# Altium PCB DC21.PcbDoc
Units mm, origin at the board's own origin, x right, y up, seen from the top; angles counter-clockwise.
Board outline 50 x 50 mm, 2 copper layers (Top Layer, Bottom Layer); 83 components, 55 nets, 253 pads, 153 vias.
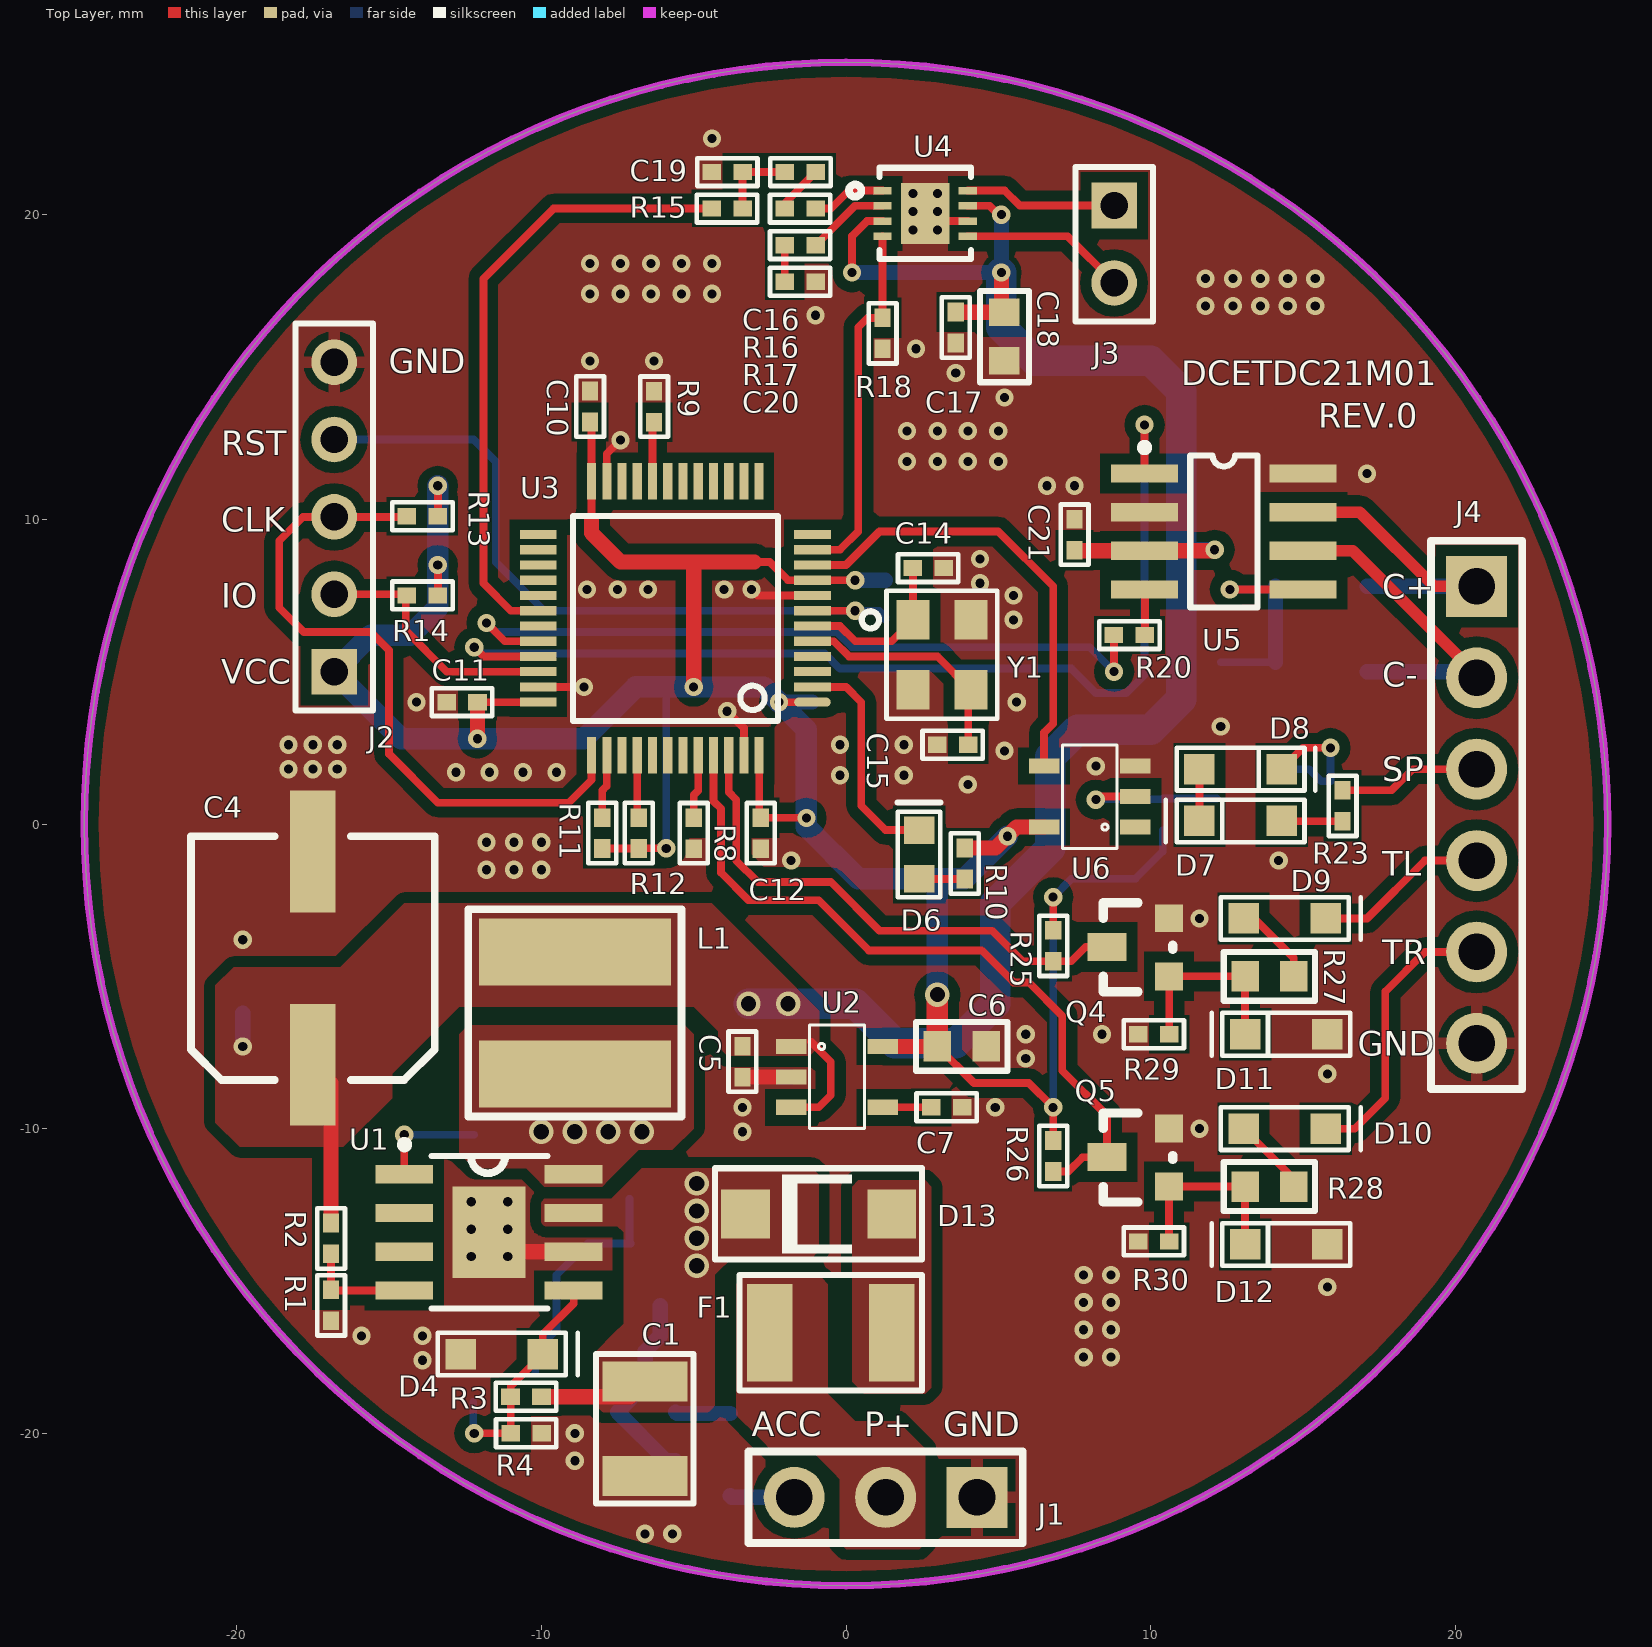
[diagram p0: Top Layer view]
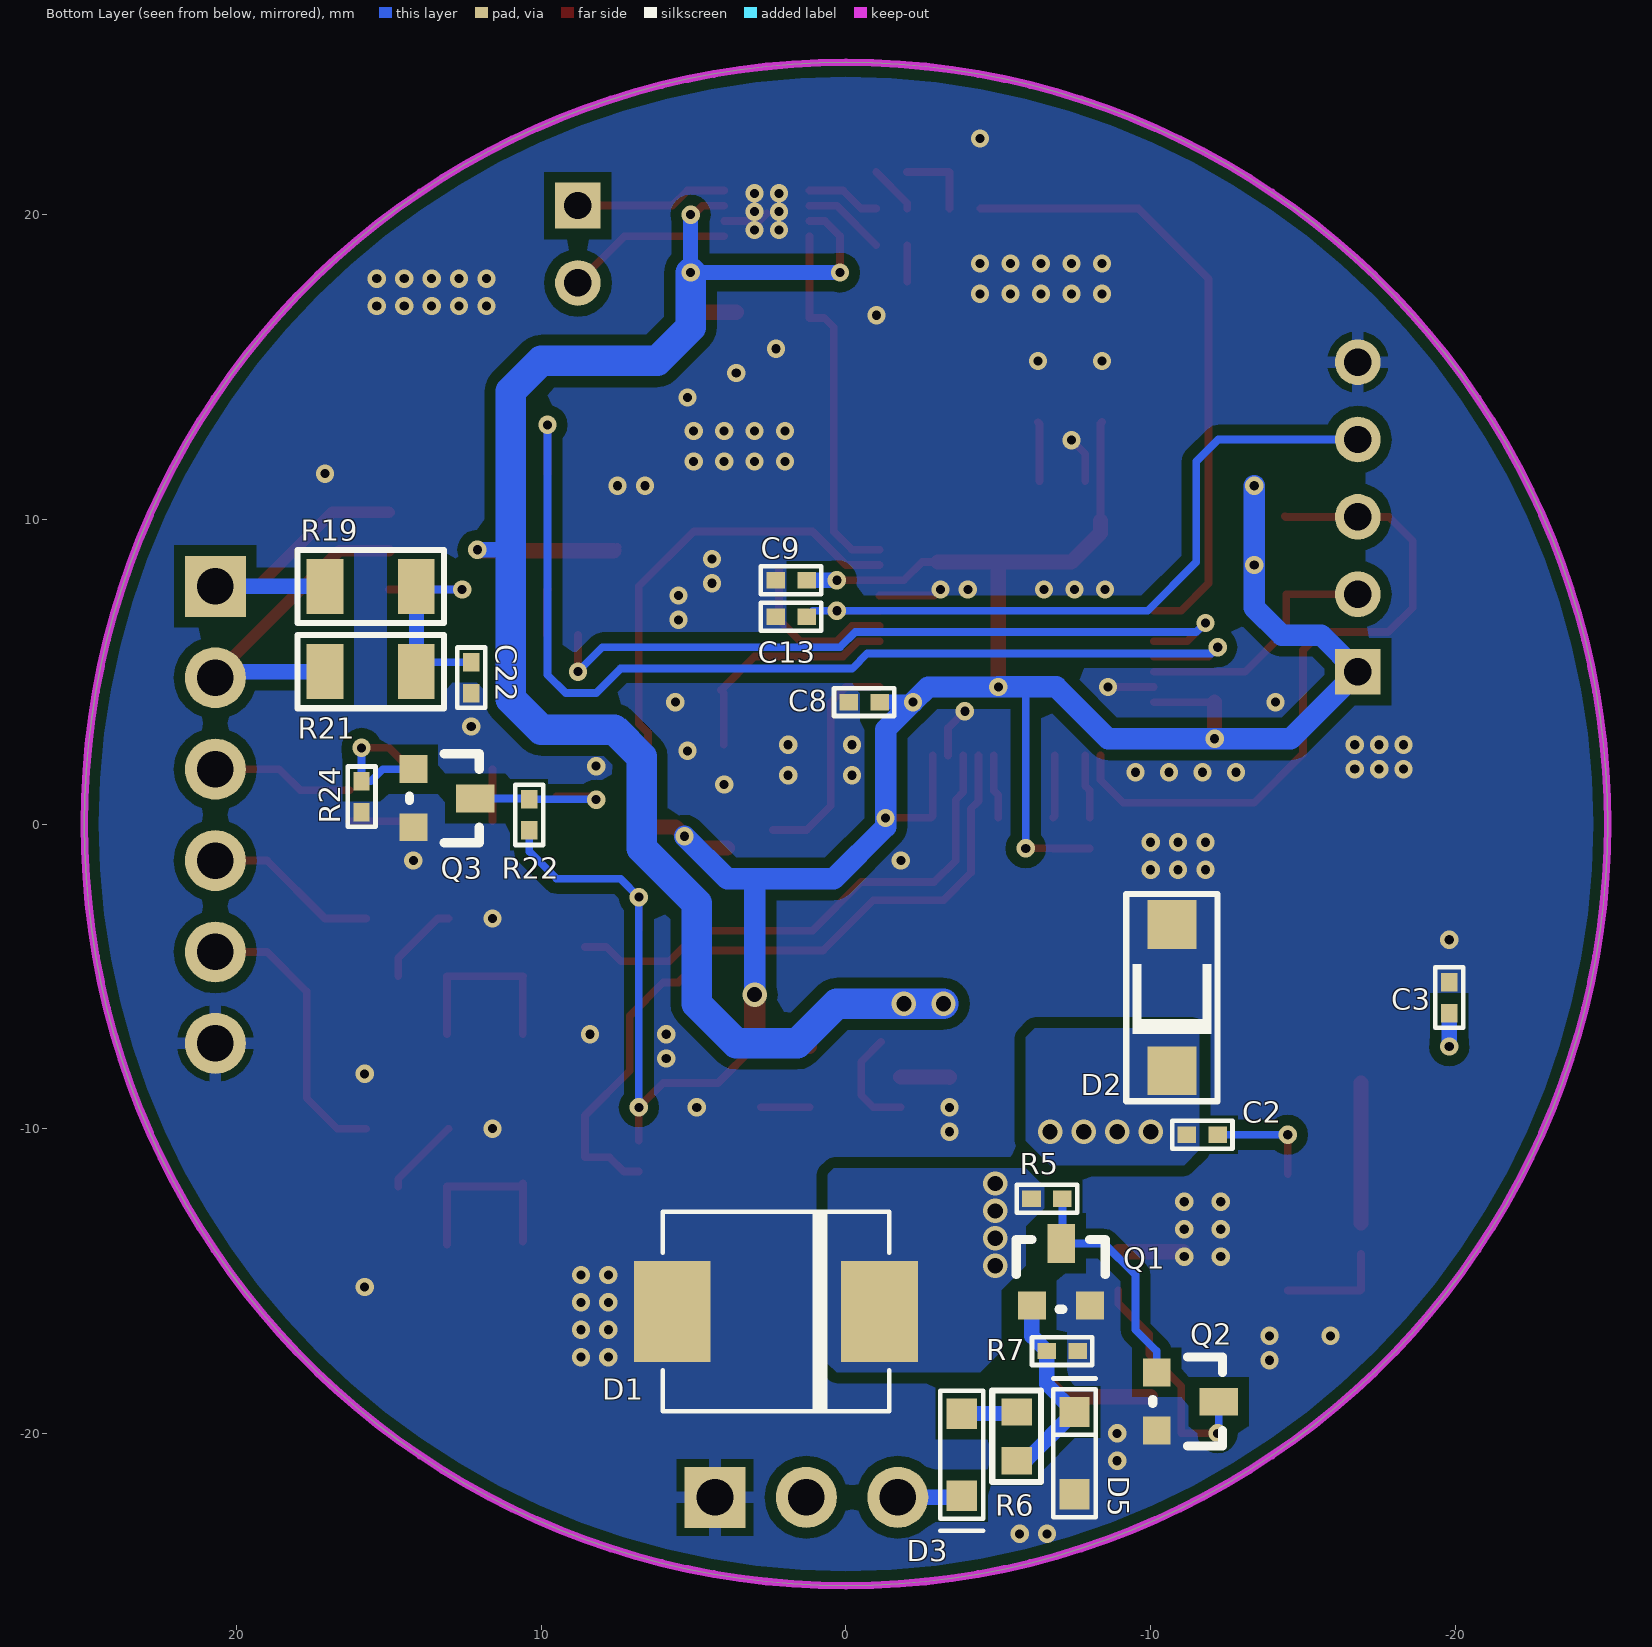
[diagram p1: Bottom Layer view, seen from below]

## Layer stack, top to bottom
Top Solder: solder mask 0.0102, Solder Resist, Dk 3.5
Top Layer: signal copper 0.0356
Dielectric 1: dielectric 0.32, FR-4, Dk 4.8
Bottom Layer: signal copper 0.0356
Bottom Solder: solder mask 0.0102, Solder Resist, Dk 3.5

## Board outline
-25,0 ccw(c0,0) 0,-25 ccw(c0,0) 25,0 ccw(c0,0) 0,25 ccw(c0,0)

## Design rules (kind name [scope] priority, off if disabled: settings)
Clearance Clearance_1 [InPolygon AND InNet('GND')] p1: gap=0.35
Clearance [All] p2: gap=0.127
ComponentClearance [All] p1: gap=0 collisioncheckmode=3 verticalgap=0 showdistances=FALSE
DiffPairsRouting [All] p1: maxlimit=0.254 minlimit=0.254 mostfreqgap=0.254 toplayer_minwidth=0.381 toplayer_maxwidth=0.5 toplayer_prefwidth=0.381 bottomlayer_minwidth=0.381 bottomlayer_maxwidth=0.5 bottomlayer_prefwidth=0.381 maxuncoupledlength=12.7
PolygonConnect PolygonConnect_1 [(InComponent('J1') OR InComponent('J2') OR InComponent('j4'))] p1: connectstyle=Relief reliefconductorwidth=0.4 reliefentries=4 polygonreliefangle="90 Angle" airgapwidth=0.254
PolygonConnect [All] p2: connectstyle=Direct reliefconductorwidth=0.254 reliefentries=4 polygonreliefangle="90 Angle" airgapwidth=0.254
RoutingVias [All] p1: holewidth=0.3 width=0.6 viastyle="Through Hole" minholewidth=0.3 minwidth=0.6 maxholewidth=0.5 maxwidth=0.8
SolderMaskExpansion [All] p1: expansion=0.102
Width [All] p1: maxlimit=4 minlimit=0.127 preferedwidth=0.254 minimp=50.000000 maximp=50.000000 favimp=50.000000
28 further rules are at their usual default settings.

## Classes and differential pairs
component class 1-POWER: C1 C2 C3 C4 C5 C6 C7 D1 D2 D3 D4 D5 D13 F1 J1 L1 Q1 Q2 R1 R2 R3 R4 R5 R6 R7 U1 U2
component class 2-MCU: C8 C9 C10 C11 C12 C13 C14 C15 D6 J2 R8 R9 R10 R11 R12 R13 R14 U3 Y1
component class 3-AUDIO-AMP: C16 C17 C18 C19 C20 J3 R15 R16 R17 R18 U4
component class 4-IO: C21 C22 D7 D8 D9 D10 D11 D12 J4 Q3 Q4 Q5 R19 R20 R21 R22 R23 R24 R25 R26 R27 R28 R29 R30 U5 U6
differential pair CAN: +CAN_P -CAN_N

## Components (designator, comment, footprint, x,y, rotation, side; value= is the part's Value field where it differs from the comment)
C1 "10uF/50V" 1210 -6.6,-18.3 r270 top
C2 "0.01uF/50V" 0402 -11.7,-10.2 r0 bottom
C3 "0.1uF/50V" 0402 -19.8,-5.7 r90 bottom
C4 "220uF/16V" DL-8*10.5 -17.5,-4.4 r180 top
C5 "0.1uF/50V" 0402 -3.4,-7.8 r270 top
C6 "10uF/6.3V" 0603 3.8,-7.3 r270 top
C7 "0.01uF/50V" 0402 3.3,-9.3 r0 top
C8 "0.1uF/50V" 0402 -0.6,4 r0 bottom
C9 "0.1uF/50V" 0402 1.8,8 r0 bottom
C10 "0.1uF/50V" 0402 -8.4,13.7 r90 top
C11 "0.1uF/50V" 0402 -12.6,4 r180 top
C12 "0.1uF/50V" 0402 -2.8,-0.3 r270 top
C13 "0.1uF" 0402 1.8,6.8 r0 bottom
C14 "20pF/50V" 0402 2.7,8.4 r180 top
C15 "20pF/50V" 0402 3.5,2.6 r0 top
C16 "0.1uF/50V" 0402 -1.5,21.4 r0 top
C17 "0.1uF/50V" 0402 3.6,16.3 r270 top
C18 "10uF/6.3V" 0603 5.2,16 r180 top
C19 "0.1uF/50V" 0402 -3.9,21.4 r0 top
C20 "0.1uF/50V" 0402 -1.5,17.8 r180 top
C21 "0.1uF/50V" 0402 7.5,9.5 r270 top
C22 "1000pF(DNP)" 0402 12.3,4.8 r90 bottom
D1 "SMDJ33A" SMC 5.7,-16 r0 bottom
D2 "B360A" B320A -10.7,-3.3 r270 bottom
D3 "MM3Z6V2ST1G" SOD323F -3.8,-20.7 r90 bottom
D4 "MM3Z5V1ST1G" SOD323F -11.3,-17.4 r180 top
D5 "1N5819HW" 1N5819 -7.5,-19.3 r270 bottom
D6 "LED GREEN" LED0603 2.4,-1.8 r180 top
D7 "1N5819HW" 1N5819 11.6,0.1 r0 top
D8 "1N5819HW" 1N5819 14.3,1.8 r180 top
D9 "MM3Z6V2ST1G" SOD323F 14.4,-3.1 r180 top
D10 "MM3Z6V2ST1G" SOD323F 14.4,-10 r180 top
D11 "1N5819HW" 1N5819 13.1,-6.9 r0 top
D12 "1N5819HW" 1N5819 13.1,-13.8 r0 top
D13 "B360A" B320A 1.5,-12.8 r180 top
F1 "1.1A/33V" 1812 1.5,-16.7 r180 top
J1 "POWER" HEAD-3P 4.3,-22.1 r180 top
J2 "SWD" HDR1X5 -16.8,5 r90 top
J3 "SPEAKER" HDR1X2 8.8,20.3 r270 top
J4 "I/O" HEAD-6P 20.7,7.8 r270 top
L1 "8.2uH/1.6A" IND-SMD-5.8*5.8 -8.9,-6.2 r180 top
Q1 "S9014" NPN -6.1,-15.8 r180 bottom
Q2 "S9014" NPN -10.2,-18 r270 bottom
Q3 "S9014" NPN 14.2,1.8 r270 bottom
Q4 "S9014" NPN 10.6,-5 r90 top
Q5 "S9014" NPN 10.6,-11.9 r90 top
R1 "1.1K/1%" 0402 -16.9,-15.8 r90 top
R2 "3.16K/1%" 0402 -16.9,-13.6 r270 top
R3 "80.2K/1%" 0402 -10.5,-18.8 r180 top
R4 "20K/1%" 0402 -10.5,-20 r0 top
R5 "47K" 0402 -6.6,-12.3 r0 bottom
R6 "15K" 0603 -5.6,-20.1 r0 bottom
R7 "47K" 0402 -7.1,-17.3 r0 bottom
R8 "0" 0402 -5,-0.3 r270 top
R9 "0" 0402 -6.3,13.7 r270 top
R10 "330" 0402 3.9,-1.3 r90 top
R11 "10K" 0402 -8,-0.3 r90 top
R12 "10K" 0402 -6.8,-0.3 r90 top
R13 "10K" 0402 -13.9,10.1 r180 top
R14 "10K" 0402 -13.9,7.5 r180 top
R15 "2K" 0402 -3.9,20.2 r180 top
R16 "150K" 0402 -1.5,20.2 r180 top
R17 "150K" 0402 -1.5,19 r180 top
R18 "10K" 0402 1.2,16.1 r90 top
R19 "62/(1/4W)(DNP)" 1206 17.1,7.8 r180 bottom
R20 "1K" 0402 9.3,6.2 r0 top
R21 "62(1/4W)(DNP)" 1206 14.1,5 r0 bottom
R22 "47K" 0402 10.4,0.3 r90 bottom
R23 "10K" 0402 16.3,0.6 r270 top
R24 "47K" 0402 15.9,0.9 r270 bottom
R25 "47K" 0402 6.8,-4 r90 top
R26 "47K" 0402 6.8,-10.9 r90 top
R27 "15K" 0603 13.9,-5 r90 top
R28 "15K" 0603 13.9,-11.9 r90 top
R29 "47K" 0402 10.1,-6.9 r0 top
R30 "47K" 0402 10.1,-13.7 r0 top
U1 "LM22676MR-ADJ" PSO8 -14.5,-11.5 r270 top
U2 "TPS73633DBVT" SOT23-5 -1.8,-7.3 r270 top
U3 "STM32F103CBT6" LQFP48 -1.1,4 r180 top
U4 "LM4673SD" WSON8 2.6,20.04 r270 top
U5 "TJA1040T" SO8 12.4,9.6 r270 top
U6 "SN74LVC1G14DBV" SOT23-5 9.5,-0.1 r90 top
Y1 "8MHz" XTAL4_SX_3225 2.2,6.7 r270 top

## Footprints (in the part's own frame and the unit in brackets; to place one, negate y for a bottom-side part, rotate by r counter-clockwise, add the part's x,y. Pads: shape width x height; smd on the part's side, far side on the other; paste and mask are expansions set on the pad)
1N5819 [mm]
  rect 1x1 smd: 1(2.7,0) 2(0,0)
  silkscreen extent -1.1,-0.7 3.45,0.7
0402 [mil] "Chip Capacitor, Body 1.0x0.5mm, IPC High Density"
  rect 24x21 smd: 1(20.13,0) 2(-19.87,0)
  silkscreen extent -39,-18 39,18
0603 [mm]
  rect 1x0.9 smd: 1(0,0.8) 2(0,-0.8)
  silkscreen extent -0.8,-1.5 0.8,1.5
1206 [mm]
  rect 1.2x1.8 smd: 1(0,0) 2(3,0)
  silkscreen extent -0.9,-1.2 3.9,1.2
1210 [mm]
  rect 1.3x2.8 smd: 1(0,0) 2(3.1,0)
  silkscreen extent -0.9,-1.6 4,1.6
1812 [mm]
  rect 1.5x3.2 smd: 1(0,0) 2(4,0)
  silkscreen extent -1,-1.9 5,1.9
B320A [mm]
  rect 1.6x1.6 smd: 1(0,0) 2(4.8,0)
  silkscreen extent -1,-1.5 5.8,1.5
DL-8*10.5 [mm]
  rect 1.5x4 smd: 1(0,3.5) 2(0,-3.5)
  silkscreen extent -4,-4 4,4
HDR1X2 [mm] "Connector; Header; 2 Position"
  rect 1.5x1.5 hole 0.9: 1(0,0)
  round 1.5 hole 0.9: 2(2.54,0)
  silkscreen extent -1.27,-1.27 3.81,1.27
HDR1X5 [mm] "Connector; Header; 5 Position"
  rect 1.5x1.5 hole 0.9: 1(0,0)
  round 1.5 hole 0.9: 2(2.54,0) 3(5.08,0) 4(7.62,0) 5(10.16,0)
  silkscreen extent -1.27,-1.27 11.43,1.27
HEAD-3P [mm]
  rect 2x2 hole 1.2: 1(0,0)
  round 2 hole 1.2: 2(3,0) 3(6,0)
  silkscreen extent -1.5,-1.5 7.5,1.5
HEAD-6P [mm]
  rect 2x2 hole 1.2: 1(0,0)
  round 2 hole 1.2: 2(3,0) 3(6,0) 4(9,0) 5(12,0) 6(15,0)
  silkscreen extent -1.5,-1.5 16.5,1.5
IND-SMD-5.8*5.8 [mm]
  rect 6.3x2.2 smd: 1(0,2) 2(0,-2)
  silkscreen extent -3.5,-3.4 3.5,3.4
LED0603 [mm]
  rect 1x0.9 smd: 1(0,0) 2(0,-1.6)
  silkscreen extent -0.7,-2.5 0.7,0.6
LQFP48 [mm]
  oval 1.2x0.3 smd: 1(0,0)
  rect 1.2x0.3 smd: 2(0,-0.5) 3(0,-1) 4(0,-1.5) 5(0,-2) 6(0,-2.5) 7(0,-3) 8(0,-3.5) 9(0,-4) 10(0,-4.5) 11(0,-5) 12(0,-5.5) 25(9,-5.5) 26(9,-5) 27(9,-4.5) 28(9,-4) 29(9,-3.5) 30(9,-3) 31(9,-2.5) 32(9,-2) 33(9,-1.5) 34(9,-1) 35(9,-0.5) 36(9,0)
  rect 0.3x1.2 smd: 13(1.75,-7.25) 14(2.25,-7.25) 15(2.75,-7.25) 16(3.25,-7.25) 17(3.75,-7.25) 18(4.25,-7.25) 19(4.75,-7.25) 20(5.25,-7.25) 21(5.75,-7.25) 22(6.25,-7.25) 23(6.75,-7.25) 24(7.25,-7.25) 37(7.25,1.75) 38(6.75,1.75) 39(6.25,1.75) 40(5.75,1.75) 41(5.25,1.75) 42(4.75,1.75) 43(4.25,1.75) 44(3.75,1.75) 45(3.25,1.75) 46(2.75,1.75) 47(2.25,1.75) 48(1.75,1.75)
  silkscreen extent 1.13,-6.11 7.86,0.62
NPN [mil]
  rect 36x50 smd: 1(38,80)
  rect 36x36 smd: 2(0,0) 3(75,0)
  silkscreen extent -20,-5 95,85
PSO8 [mm]
  rect 0.6x1.9 smd: 1(0,0) 2(1.27,0) 3(2.54,0) 4(3.81,0) 5(3.81,5.56) 6(2.54,5.56) 7(1.27,5.56) 8(0,5.56)
  rect 3x2.4 smd: 9(1.9,2.78)
  silkscreen extent -1.1,-0.11 4.4,4.7
SMC [mil]
  rect 99x130 smd: 1(0,0) 2(-267.72,0)
  silkscreen extent -280,-129 12,129
SO8 [mm] "Small Outline; 8 Leads; Body Width 3.9 mm; Pitch 1.27 mm"
  rect 0.6x2.2 smd: 1(-1.905,-2.6) 2(-0.635,-2.6) 3(0.635,-2.6) 4(1.905,-2.6) 5(1.905,2.6) 6(0.635,2.6) 7(-0.635,2.6) 8(-1.905,2.6)
  silkscreen extent -2.88,-2.72 2.5,1.1
SOD323F [mm]
  rect 1x1 smd: 1(-1.35,0) 2(1.35,0)
  silkscreen extent -2.5,-0.7 2.1,0.7
SOT23-5 [mm]
  rect 0.5x1 smd: 1(0,0) 2(1,0) 3(2,0) 4(2,3) 5(0,3)
  silkscreen extent -0.7,0.6 2.7,2.4
WSON8 [mm]
  rect 0.25x0.6 smd: 1(-0.75,-1.4) 2(-0.25,-1.4) 3(0.25,-1.4) 4(0.75,-1.4) 5(0.75,1.4) 6(0.25,1.4) 7(-0.25,1.4) 8(-0.75,1.4)
  rect 2x1.6 smd: ""(0,0)
  silkscreen extent -1.5,-2.5 1.5,1.5
XTAL4_SX_3225 [mil]
  rect 51x43 smd: 1(0,0) 2(90.56,0) 3(90.56,74.8) 4(0,74.8)
  silkscreen extent -37,-66 128,109

## Part data
C1 C2 C3 C5 C6 C7 C8 C9 C10 C11 C12 C13 C14 C15 C16 C17 C18 C19 C20: library part Cap, "Capacitor"
C4: library part "CAP WP"
C21 C22: library part "P_CAP NP"
D1 D2 D5 D7 D8 D11 D12 D13: library part "Diode 11DQ03", "Schottky Rectifier"
D3 D4 D9 D10: library part MMGZ5231BPTLL34
D6: library part LN01401_1
F1: library part 2A_32VDC_0467-002
J1: library part "Header 3", "Header, 3-Pin"
J2: library part "Header 5", "Header, 5-Pin"
J3: library part "Header 2", "Header, 2-Pin"
J4: library part "Header 6", "Header, 6-Pin"
L1: library part 4.7UH_CDH2D09BNP-4R7MC_0.7A_20%
Q1 Q2 Q3 Q4 Q5: library part MMBT3904_NL_SOT23-3
R1 R2 R3 R4 R5 R8 R9 R11 R12 R13 R14 R15 R16 R17 R18 R25 R26: library part Res3, "Resistor"
R6 R7 R27 R28 R29 R30: library part R
R10: library part CR16-1003FM
R19 R20 R21 R22 R23 R24: library part P_R
U1: library part LM22670_0
U3: library part STM32F103CX-LQFP48
U5: library part TJA1040T_SO_8P, "IC XCVR CAN HS 5V SO8"
U6: library part 74LVC1G04GW_SOT353-5
Y1: library part XTAL_13Y_A, "XTAL 24MHZ -- 3.2X2.5MM SMT"

## Via types
v1: diameter 0.6, hole 0.3, Top Layer to Bottom Layer, tented both sides, 142 vias
v2: diameter 0.8, hole 0.5, Top Layer to Bottom Layer, tented both sides, 11 vias

## Nets (pads, with @x,y where several pads share a name; then routed paths per layer and width w, separated by ;. In a path a pad name is that pad's centre, name@x,y a point inside that pad or via, vN(x,y) a via of type N, cw(c..) or ccw(c..) an arc to the next point about the centre after c; other vN are vias at no path point)
ACC: D3.1 J1.3 | length 2.1
  Bottom Layer w0.5: D3.1 -3.75,-22.1 J1.3
AMP-SHDN: R18.1 U3.11 U4.4 | length 12.1
  Top Layer w0.254: U3.11 -0.2,9 0.4,9.6 0.4,16.3 0.711,16.611 R18.1 U4.4
CAN_N: J4.2 R21.2 U5.6 | length 10.7
  Top Layer w0.381: U5.6 16.635,8.965 20.7,4.9 J4.2
  Bottom Layer w0.381: J4.2@20.075,5 J4.2@20.275,4.8
  Bottom Layer w0.5: R21.2 J4.2@20.075,5
CAN_P: J4.1 R19.1 U5.7 | length 9.9
  Top Layer w0.381: U5.7 16.865,10.235 19.3,7.8 J4.1
  Bottom Layer w0.5: R19.1 J4.1@20.275,7.8
CANRX: R20.2 U3.32 | length 24.4
  Top Layer w0.254: v1(-11.8,6.6) -11.2,6 U3.32 ; R20.2 8.795,5.005 v1(8.8,5)
  Bottom Layer w0.254: v1(-11.8,6.6) -11.5,6.3 -0.3,6.3 0.2,5.8 8,5.8 v1(8.8,5)
CANTX: U3.33 U5.1 | length 34.9
  Top Layer w0.254: v1(-12.2,5.8) -11.9,5.5 U3.33 ; U5.1 v1(9.8,13.1)
  Bottom Layer w0.254: v1(-12.2,5.8) -12,5.6 -0.7,5.6 -0.2,5.1 7.4,5.1 8.2,4.3 9.2,4.3 9.8,4.9 v1(9.8,13.1)
GND: C1.2 C3.1 C4.2 C5.1 C6.1 C7.1 C8.1 C9.1 C10.1 C11.1 C12.1 C13.1 C14.2 C15.2 C17.1 C18.1 C19.2 C20.2 C21.2 C22.2 D1.1 D2.1 D4.2 D5.1 D11.1 D12.1 J1.1 J2.5 J4.6 Q1.3 Q2.3 Q3.3 Q4.3 Q5.3 R1.2 R4.1 R7.2 R8.1 R9.2 R18.2 R24.1 R29.2 R30.2 U1.6 U1.9 U2.2 U3.8 U3.23 U3.35 U3.47 U4. U4.6 U5.2 U5.8 U6.3 Y1.2 Y1.4 | length 12
  Top Layer w0.254: U3.35 v1(-8.6,4.5) ; U3.23 -7.85,12.15 v1(-7.4,12.6) ; v1(-3.9,3.7) -3.35,3.15 U3.47 ; v1(-3.1,7.7) -2.9,7.5 U3.8 ; U4. 2.85,19.79 U4.6
  Top Layer w0.5: U1.9@-11.08,-14.04 U1.6 ; C5.1 -3.389,-8.3 U2.2
  other v1: -6.6,-23.3 -5.7,-23.3 -8.9,-20.9 -8.9,-20 -13.9,-17.6 7.8,-17.5 8.7,-17.5 -15.9,-16.8 -13.9,-16.8 7.8,-16.6 8.7,-16.6 7.8,-15.7 8.7,-15.7 15.8,-15.2 7.8,-14.8 8.7,-14.8 -12.3,-14.2 -11.1,-14.2 -12.3,-13.3 -11.1,-13.3 -12.3,-12.4 -11.1,-12.4 -3.4,-10.1 11.6,-10 -3.4,-9.3 4.9,-9.3 15.8,-8.2 5.9,-7.7 5.9,-6.9 8.4,-6.9 -19.8,-3.8 11.6,-3.1 -11.8,-1.5 -10.9,-1.5 -10,-1.5 -1.8,-1.2 14.2,-1.2 -11.8,-0.6 -10.9,-0.6 -10,-0.6 4,1.3 -0.2,1.6 1.9,1.6 -12.8,1.7 -11.7,1.7 -10.6,1.7 -9.5,1.7 -18.3,1.8 -17.5,1.8 -16.7,1.8 8.2,1.9 5.2,2.4 -18.3,2.6 -17.5,2.6 -16.7,2.6 -0.2,2.6 1.9,2.6 12.3,3.2 -14.1,4 5.6,4 5.5,6.7 5.5,7.5 -8.5,7.7 -7.5,7.7 -6.5,7.7 -4,7.7 4.4,7.9 4.4,8.7 6.6,11.1 7.5,11.1 17.1,11.5 2,11.9 3,11.9 4,11.9 5,11.9 2,12.9 3,12.9 4,12.9 5,12.9 5.2,14 3.6,14.8 -8.4,15.2 -6.3,15.2 2.3,15.6 -1,16.7 11.8,17 12.7,17 13.6,17 14.5,17 15.4,17 -8.4,17.4 -7.4,17.4 -6.4,17.4 -5.4,17.4 -4.4,17.4 11.8,17.9 12.7,17.9 13.6,17.9 14.5,17.9 15.4,17.9 -8.4,18.4 -7.4,18.4 -6.4,18.4 -5.4,18.4 -4.4,18.4 2.2,19.5 3,19.5 2.2,20.1 3,20.1 2.2,20.7 3,20.7 -4.4,22.5
LED: D6.2 U3.2 | length 7.4
  Top Layer w0.254: U3.2 0,4.5 0.5,4 0.5,0.6 1.3,-0.2 D6.2
NetC2_1: C2.1 D2.2 L1.1 U1.8
  other v2: -10,-10.1 -8.9,-10.1 -7.8,-10.1 -6.7,-10.1
NetC2_2: C2.2 U1.1 | length 3.6
  Top Layer w0.254: U1.1 v1(-14.5,-10.2)
  Bottom Layer w0.254: v1(-14.5,-10.2) C2.2
NetC7_2: C7.2 U2.4 | length 1.6
  Top Layer w0.254: U2.4 C7.2
NetC16_1: C16.1 R16.1 | length 1.6
  Top Layer w0.254: R16.1 -2.011,20.378 C16.1
NetC16_2: C16.2 C19.1 R15.2 | length 2.6
  Top Layer w0.254: R15.2 -3.395,21.394 C19.1 C16.2
NetC20_1: C20.1 R17.1 | length 1.2
  Top Layer w0.254: C20.1 R17.1
NetC22_1: C22.1 R19.2 R21.1 U5.5 | length 8.2
  Top Layer w0.254: v1(12.6,7.7) 12.605,7.695 U5.5
  Bottom Layer w0.254: C22.1 14.089,5.311 R21.1@14.1,5.3 ; v1(12.6,7.7) 14,7.7 R19.2
  Bottom Layer w0.5: R21.1@14.1,5.3 R19.2
NetD3_2: D3.2 R6.2 | length 1.8
  Bottom Layer w0.5: R6.2 -5.55,-19.35 D3.2
NetD4_1: D4.1 Q2.1 R3.1 R4.2 U1.5 | length 7.9
  Top Layer w0.254: v1(-12.2,-20) R4.2 -11.005,-18.455 D4.1 -9.95,-16.75 -8.94,-15.74 U1.5
  Bottom Layer w0.254: Q2.1 -12.232,-20.032 v1(-12.2,-20)
NetD5_2: D5.2 Q1.2 R6.1 R7.1 | length 6.6
  Bottom Layer w0.5: Q1.2 -6.1,-16.811 R7.1 -6.589,-18.389 D5.2 -5.9,-20.9 R6.1
NetD6_1: D6.1 R10.2 | length 1.5
  Top Layer w0.254: D6.1 2.405,-1.805 R10.2
NetD7_1: D7.1 R23.1 | length 2
  Top Layer w0.254: D7.1 14.311,0.089 R23.1
NetD7_2: D7.2 D8.1 | length 1.7
  Top Layer w0.254: D7.2 D8.1
NetD8_2: D8.2 Q3.2 R24.2 | length 4.8
  Top Layer w0.254: D8.2 15,2.5 v1(15.9,2.5)
  Bottom Layer w0.254: Q3.2 15.2,1.8 15.595,1.405 R24.2 v1(15.9,2.5)
NetD9_2: D9.2 R27.2 | length 2.8
  Top Layer w0.254: D9.2 13.4,-3.1 14.7,-4.4 R27.2
NetD10_2: D10.2 R28.2 | length 2.6
  Top Layer w0.254: D10.2 14.7,-11.65 R28.2
NetD11_2: D11.2 Q4.2 R27.1 R29.1 | length 6.3
  Top Layer w0.254: R29.1 10.611,-5.011 Q4.2 R27.1 D11.2
NetD12_2: D12.2 Q5.2 R28.1 R30.1 | length 6.3
  Top Layer w0.254: R30.1 10.6,-13.689 10.6,-11.8 10.7,-11.9 R28.1 D12.2
NetD13_1: D13.1 F1.1
NetF1_2: F1.2 J1.2
NetJ3_1: J3.1 U4.8 | length 5
  Top Layer w0.254: U4.8 5.21,20.79 5.7,20.3 J3.1
NetJ3_2: J3.2 U4.5 | length 5.4
  Top Layer w0.254: U4.5 7.27,19.29 J3.2
NetQ1_1: Q1.1 Q2.2 R5.2 | length 7.8
  Bottom Layer w0.254: Q2.2 -10.2,-17.3 -9.5,-16.6 -9.5,-14.8 -8.468,-13.768 Q1.1 -7.105,-13.728 R5.2
NetQ3_1: Q3.1 R22.1 U6.2 | length 5.3
  Top Layer w0.254: v1(8.2,0.8) 8.3,0.9 U6.2
  Bottom Layer w0.254: v1(8.2,0.8) 8.211,0.811 R22.1 10.424,0.835 Q3.1
NetR1_1: R1.1 R2.1 U1.4 | length 3.6
  Top Layer w0.254: R2.1 R1.1 -16.879,-15.31 U1.4
NetR8_2: R8.2 U3.44 | length 2.1
  Top Layer w0.254: R8.2 -5,0.95 -4.85,1.1 U3.44
NetR9_1: R9.1 U3.20 | length 2
  Top Layer w0.254: U3.20 -6.35,13.139 R9.1
NetR11_1: R11.1 U3.38 | length 2.1
  Top Layer w0.254: R11.1 -8,1.1 -7.85,1.25 U3.38
NetR12_1: R12.1 U3.40 | length 2.1
  Top Layer w0.254: U3.40 -6.85,0.261 R12.1
NetR16_2: R16.2 U4.1 | length 2.4
  Top Layer w0.254: R16.2 -0.5,20.2 0.09,20.79 U4.1
NetR17_2: R17.2 U4.2 | length 2.7
  Top Layer w0.254: R17.2 0.295,20.29 U4.2
NetR20_1: R20.1 U5.4 | length 1.5
  Top Layer w0.254: U5.4 9.811,7.684 R20.1
NRST: C13.2 J2.4 U3.7 | length 24.1
  Top Layer w0.254: U3.7 v1(0.3,7)
  Bottom Layer w0.254: J2.4 -12.22,12.62 -11.5,11.9 -11.5,8.6 -9.9,7 v1(0.3,7) 1.095,7 C13.2 1.195,6.8 C13.2@1.295,6.7
P3V3: C6.2 C8.2 C9.2 C10.2 C11.2 C12.2 J2.1 R10.1 R11.2 R12.2 R13.2 R14.2 R22.2 R25.1 R26.1 U2.5 U3.1 U3.9 U3.24 U3.36 U3.48 U6.5 | length 102.9
  Top Layer w0.254: R14.2 v1@-13.395,8.495 ; R13.2 v1@-13.395,11.1 ; C11.2 U3.36 ; C10.2 -8.35,13.145 U3.24 -8.35,9.95 ; R11.2 R12.2 -6.795,-0.8 v1(-5.9,-0.8) ; -3,8.6 -2.5,8.6 -1.9,8 U3.9 v1(0.3,8) ; U3.48 -2.85,0.255 C12.2 -1.305,0.205 v1(-1.3,0.2) ; v1(-2.2,4) U3.1 ; C6.2 4.2,-8.5 6,-8.5 v1(6.8,-9.3) R26.1 ; R25.1 v1(6.8,-2.4)
  Top Layer w0.5: v1(-13.4,8.5) v1@-13.395,8.495 ; v1(-12.1,2.8) -12.095,2.805 C11.2 ; -8.35,9.95 -8.35,9.55 -7.4,8.6 -5,8.6 ; v1(-5,4.5) -5,8.6 ; -3,8.6 -5,8.6 ; U2.5 C6.2 ; R10.1 4.911,-0.789 v1(5.3,-0.4) 5.6,-0.1 U6.5
  Top Layer w0.7: C6.2 v2(3,-5.6)
  Bottom Layer w0.254: v1(-5.9,-0.8) -5.9,4.496 ; v1(6.8,-9.3) v1(6.8,-2.4) 7.4,-1.8 9.5,-1.8 10.4,-0.9 R22.2
  Bottom Layer w0.5: v1(-2.2,4) C8.2 ; v1(0.3,8) C9.2
  Bottom Layer w0.7: v1(-13.4,11.1) v1(-13.4,8.5) -13.4,7.1 -14.3,6.2 -15.6,6.2 J2.1 -14.6,2.8 v1(-12.1,2.8) -8.6,2.8 -6.9,4.5 v1(-5,4.5) ; -5.6,4.496 -2.696,4.496 v1(-2.2,4) -1.3,3.1 v1(-1.3,0.2) -1.3,-0.1 0.4,-1.8 3,-1.8 ; v2(3,-5.6) 3,-1.8 ; v1(5.3,-0.4) 3.9,-1.8 3,-1.8
P5V0: C3.2 C4.1 C5.2 C17.2 C18.2 C21.1 L1.2 R2.2 U2.1 U2.3 U4.3 U4.7 U5.3 | length 70.1
  Top Layer w0.254: U2.3 -0.9,-9.3 -0.5,-8.9 -0.5,-7.8 -1.15,-7.15 ; v1(0.2,18.1) 0.2,19.3 0.69,19.79 U4.3 ; U4.7 4.71,20.29 5,20 v1(5.1,20) ; C21.1@7.5,9.089 C21.1@7.624,8.965 ; v1@12.065,8.965 v1(12.1,9)
  Top Layer w0.5: R2.2 C4.1@-16.9,-8.5 ; C17.2 3.605,16.8 C18.2 5.1,16.9 v1(5.1,18.1) ; C21.1@7.624,8.965 U5.3 v1@12.065,8.965
  Bottom Layer w0.5: v1(-19.8,-7.3) C3.2 ; v1(0.2,18.1) v1(5.1,18.1) v1(5.1,20) ; 11,9 v1(12.1,9)
  Bottom Layer w1: v2(-3.2,-5.9) v2(-1.9,-5.9) 0.3,-5.9 1.6,-7.2 3.6,-7.2 4.9,-5.9 4.9,-2.6 6.7,-0.8 6.7,2.2 7.6,3.1 10,3.1 11,4.1 11,9 11,14.2 10,15.2 6.2,15.2 5.1,16.3 v1(5.1,18.1)
PULSE: J4.3 R23.2 | length 4.7
  Top Layer w0.254: R23.2 17.905,1.105 18.6,1.8 J4.3
PWM-AUDIO: R15.1 U3.30 | length 20.6
  Top Layer w0.254: U3.30 -11,7 -11.9,7.9 -11.9,17.9 -9.6,20.2 R15.1
SPEED-PULSE: U3.10 U6.4 | length 15.1
  Top Layer w0.254: U3.10 0,8.5 1.1,9.6 5,9.6 6.8,7.8 6.8,3.3 6.5,3 U6.4
SWCLK: J2.3 R13.1 U3.37 | length 22.7
  Top Layer w0.254: R13.1 -14.431,10.08 J2.3 -17.82,10.08 -18.6,9.3 -18.6,7.1 -17.8,6.3 -15.6,6.3 -15,5.7 -15,2.3 -13.4,0.7 -9.1,0.7 -8.35,1.45 U3.37
SWDIO: J2.2 R14.1 U3.34 | length 8.4
  Top Layer w0.254: J2.2 -14.451,7.54 -14.451,6.351 -13.1,5 U3.34
TL: D9.1 J4.4 | length 5.7
  Top Layer w0.254: D9.1 17.1,-3.1 19,-1.2 J4.4
TR: D10.1 J4.5 | length 9.4
  Top Layer w0.254: D10.1 16.7,-10 17.7,-9 17.7,-5.5 19,-4.2 J4.5
TURN-LEFT: Q4.1 R25.2 U3.46 | length 17.3
  Top Layer w0.254: U3.46 -3.85,1.05 -3.6,0.8 -3.6,-1.2 -2.9,-1.9 -0.5,-1.9 1.1,-3.5 4.795,-3.5 5.8,-4.505 R25.2 7.395,-4.505 7.865,-4.035 Q4.1
TURN-RIGHT: Q5.1 R26.2 U3.45 | length 24.3
  Top Layer w0.254: U3.45 -4.35,0.75 -4.1,0.5 -4.1,-1.6 -3.2,-2.5 -0.9,-2.5 0.75,-4.15 4.45,-4.15 5.5,-5.2 6,-5.2 7.1,-6.3 7.1,-8.1 8.568,-9.568 Q5.1 7.765,-10.935 7.295,-11.405 R26.2
VIN: C1.1 D1.2 D13.2 R3.2 R5.1 U1.7 | length 3.6
  Top Layer w0.5: R3.2 -7.1,-18.8 C1.1
  other v2: -4.9,-14.5 -4.9,-13.6 -4.9,-12.7 -4.9,-11.8
XIN: C15.1 U3.5 Y1.3 | length 7.7
  Top Layer w0.254: U3.5 -0.4,6 0.1,5.5 3,5.5 Y1.3 4.011,4.311 C15.1
XOUT: C14.1 U3.6 Y1.1 | length 5.5
  Top Layer w0.254: U3.6 -0.2,6.5 0.3,6 1.5,6 Y1.1 2.2,8.389 C14.1
pads on no net: U1.2 U1.3 U3.3 U3.4 U3.12 U3.13 U3.14 U3.15 U3.16 U3.17 U3.18 U3.19 U3.21 U3.22 U3.25 U3.26 U3.27 U3.28 U3.29 U3.31 U3.39 U3.41 U3.42 U3.43 U6.1

## Polygon pours and split planes (outlines as drawn)
GND on Top Layer "Top Layer-No Net 1" (solid, remove dead copper, pour order 24): -25.8,25.8 26.1,25.8 26.1,23.9 26.1,-25.7 21.8,-25.7 -25.8,-25.7
P5V0 on Top Layer "Top Layer-No Net 1" (solid, remove dead copper, pour order 20): -18.7,-10.6 -17.2,-10.6 -16.5,-10.6 -14.9,-9 -14.9,-8.2 -13.7,-7 -13.3,-6.6 -12.7,-6 -5,-6 -4.2,-6.8 -4.2,-7.3 -3.9,-7.612 -1.188,-7.612 -0.875,-7.3 -0.875,-6.125 -3.6,-3.4 -4.4,-2.6 -14.5,-2.6 -16.6,-4.7 -20.1,-4.7 -20.7,-5.3 -20.7,-9.8 -19.9,-10.6
NetC2_1 on Top Layer "Top Layer-No Net 1" (solid, remove dead copper, pour order 18): -8.8,-11.9 -8,-11.9 -7.8,-11.7 -6.8,-10.7 -6.3,-10.7 -5.7,-10.7 -5,-10 -5,-6.9 -5.3,-6.6 -12.4,-6.6 -12.7,-6.9 -12.7,-10.8 -12.2,-11.3 -10.5,-11.3 -10.2,-11.6 -9.9,-11.9
VIN on Top Layer "Top Layer-No Net 1" (solid, remove dead copper, pour order 10): -6.7,-11.3 -2.6,-11.3 -0.614,-11.3 -0.4,-11.514 -0.4,-14 -0.6,-14.2 -3.7,-14.2 -4.3,-14.8 -4.3,-19.1 -4.5,-19.3 -8,-19.3 -8.2,-19.1 -8.2,-17.3 -7.6,-16.7 -7.3,-16.4 -7.3,-15.5 -7.3,-13.8 -7.3,-13.4 -7.5,-13.2 -9.9,-13.2 -10,-13.1 -10,-12.4 -9.9,-12.3 -7.7,-12.3 -7.1,-11.7
NetD13_1 on Top Layer "Top Layer-No Net 1" (solid, remove dead copper, pour order 8): 1.8,-18.7 2.6,-18.7 2.8,-18.5 2.8,-11.9 2.6,-11.7 0.4,-11.7 0.2,-11.9 0.2,-18.3 0.6,-18.7
NetF1_2 on Top Layer "Top Layer-No Net 1" (solid, remove dead copper, pour order 6): 1,-23.8 1.6,-23.8 2.4,-23.8 2.6,-23.6 2.6,-20.5 1.7,-19.6 0.3,-19.6 -0.6,-18.7 -0.6,-17.6 -0.6,-15.1 -0.8,-14.9 -3.4,-14.9 -3.6,-15.1 -3.6,-19.4 -2.9,-20.1 -2.3,-20.7 -1,-20.7 -0.4,-21.3 -0.2,-21.5 -0.2,-22.4 -0.2,-23.6 0,-23.8
GND on Bottom Layer "Top Layer-No Net 1" (solid, remove dead copper, pour order 26): -26.5,-27.7 27.8,-27.7 27.7,-27.6 27.7,27.2 -26.5,27.2
NetC2_1 on Bottom Layer "Top Layer-No Net 1" (solid, remove dead copper, pour order 22): -11.2,-6.7 -7.5,-6.7 -6.2,-6.7 -5.9,-7 -5.9,-10.4 -6.7,-11.2 -9.9,-11.2 -11.1,-11.2 -11.6,-10.7 -11.6,-8 -11.6,-6.9 -11.4,-6.7
VIN on Bottom Layer "Top Layer-No Net 1" (solid, remove dead copper, pour order 12): 0.3,-18 -2.7,-18 -4.4,-18 -5.1,-17.3 -5.1,-15.3 -5.902,-14.498 -5.903,-13.208 -6.3,-12.81 -6.505,-12.605 -6.505,-11.9 -5.903,-11.298 0.397,-11.298 0.603,-11.503 0.603,-17.7

## Keep-outs
Keep-Out Layer:
  circle w0.254: c0,0 r25

## Silkscreen, mask and mechanical layers (free items; w line width, h text height)
Top Overlay:
  text "GND" at -15,14.8 h0.8
  text "DCETDC21M01" at 11,14.4 h0.8
  text "REV.0" at 15.5,13 h0.8
  text "RST" at -20.5,12.1 h0.8
  text "CLK" at -20.5,9.6 h0.8
  text "C+" at 17.6,7.4 h0.8
  text "IO" at -20.5,7.1 h0.8
  text "VCC" at -20.5,4.6 h0.8
  text "C-" at 17.6,4.5 h0.8
  text "SP" at 17.6,1.4 h0.8
  text "TL" at 17.6,-1.7 h0.8
  text "TR" at 17.6,-4.6 h0.8
  text "GND" at 16.8,-7.6 h0.8
  text "ACC" at -3.1,-20.1 h0.8
  text "P+" at 0.6,-20.1 h0.8
  text "GND" at 3.2,-20.1 h0.8